# EAGLE board Digital Dice_Board (EAGLE 9.5.2)
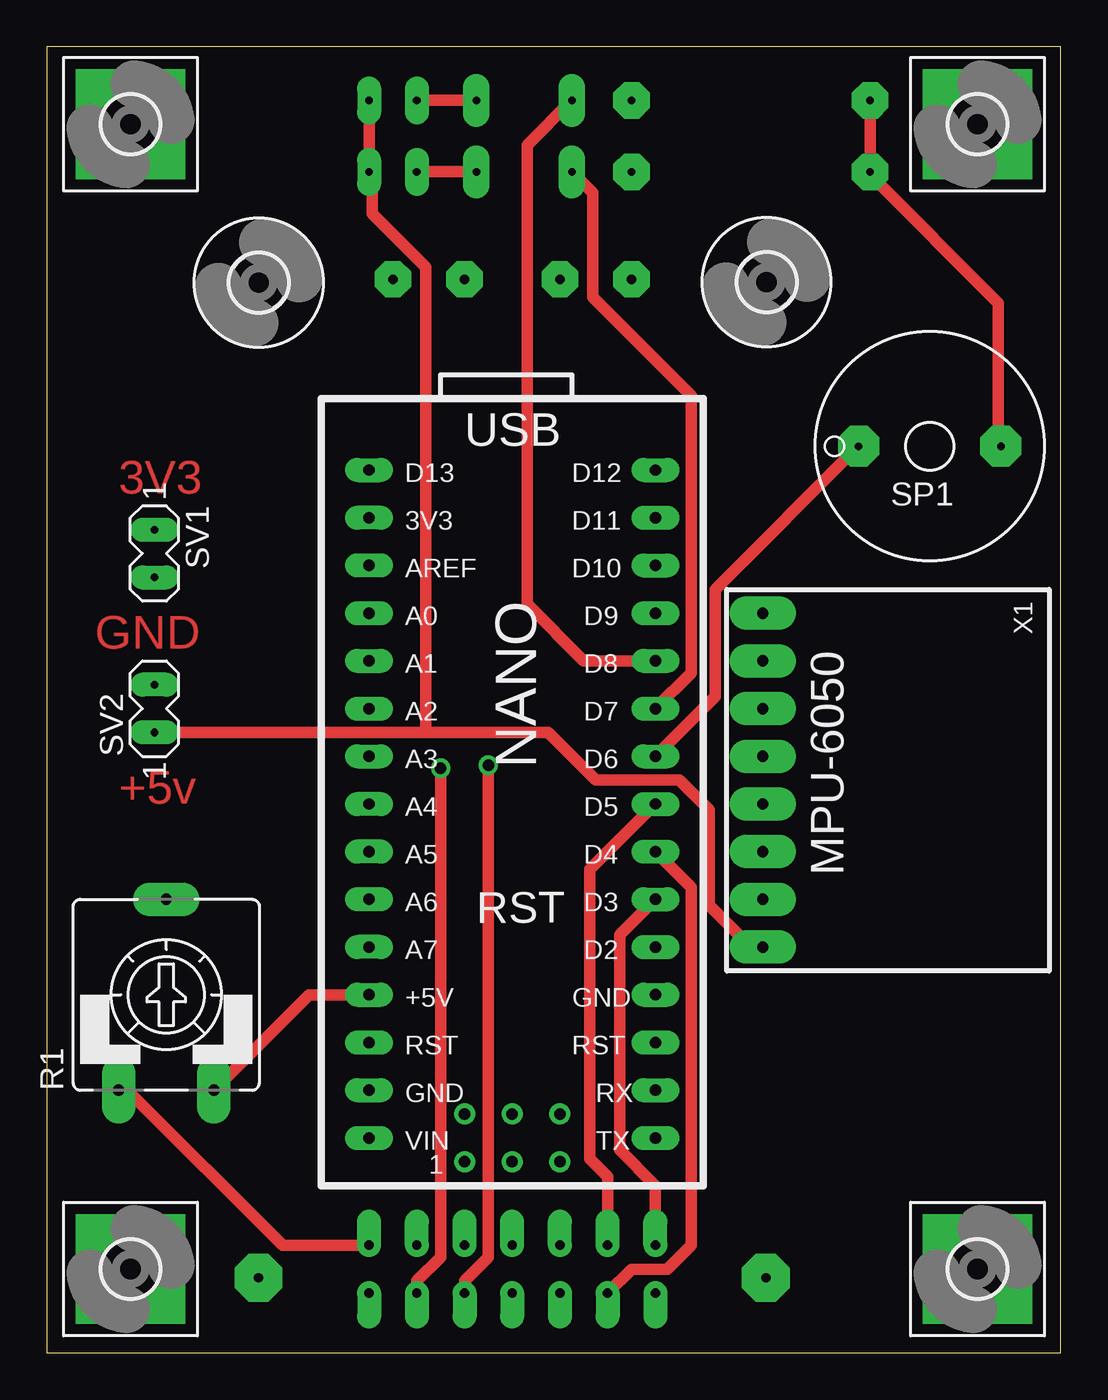
[diagram p0: board, top side]
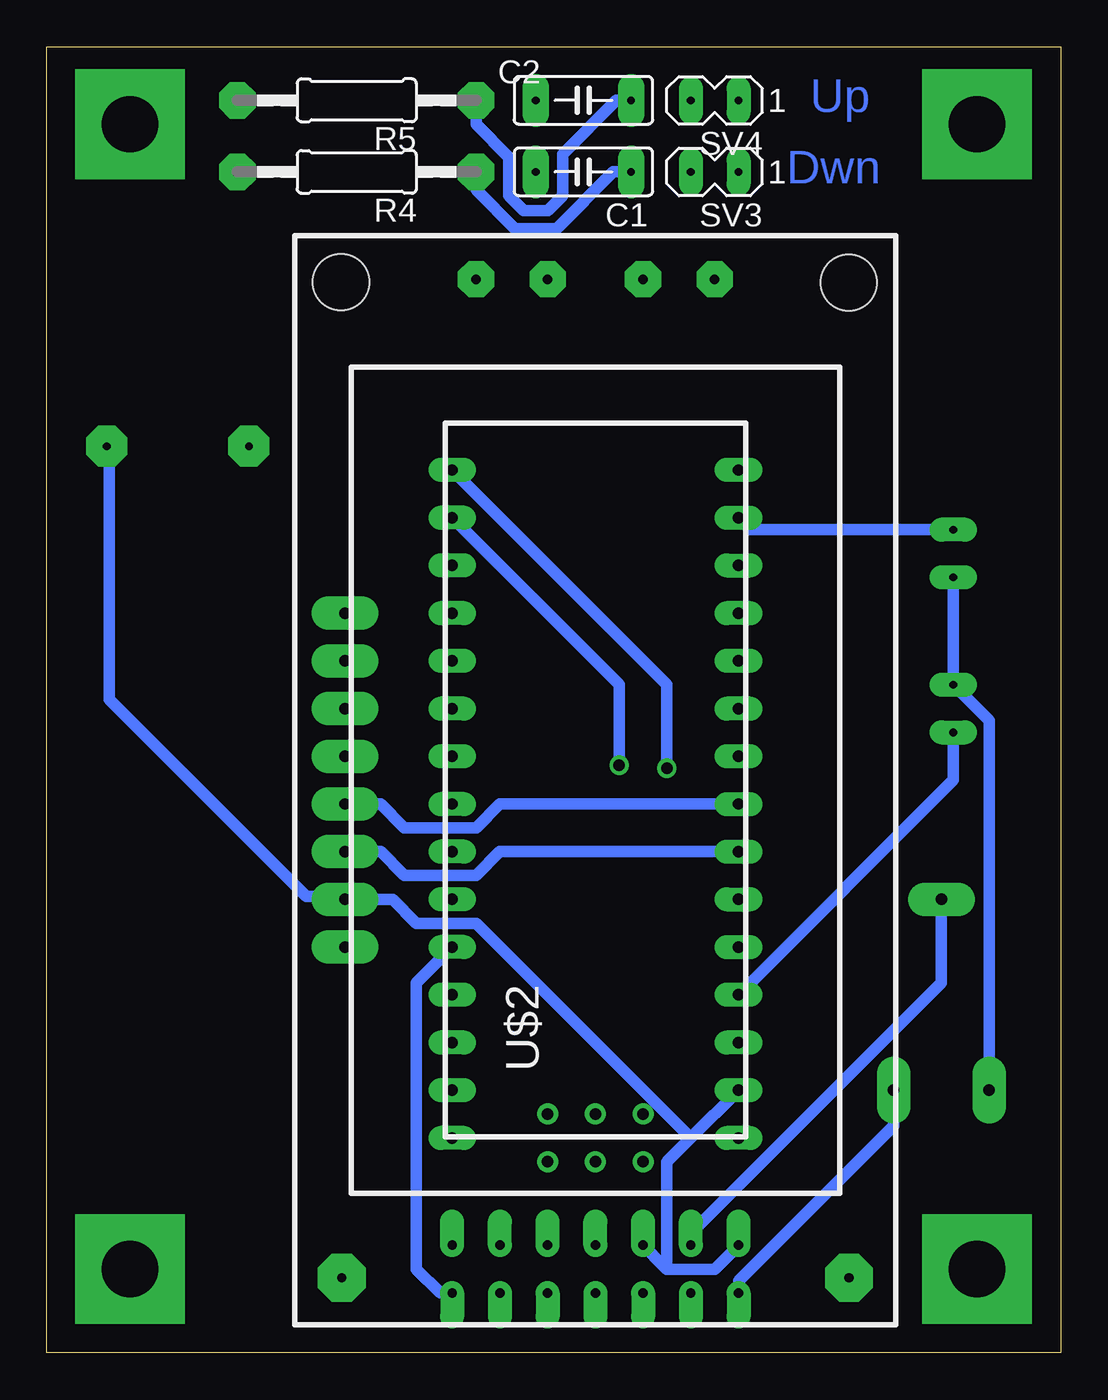
[diagram p1: board, bottom side, seen from below]

Size 53.95 x 69.52 mm. Coordinates in mm from the lower left corner, seen from the top.
Outline: 0,0 53.95,0 53.95,69.52 0,69.52 0,0
Copper layers (1*16): Top 0.035mm / dielectric 1.5mm / Bottom 0.035mm
Design rules "default *": minimum track width 24mil, minimum drill 24mil, track to track 13mil, track to pad 13mil, pad to pad 13mil, via to via 13mil, smd to smd 13mil, copper to edge 40mil, drill to drill 6mil, minimum pad ring 10mil, minimum via ring 8mil, stop-mask expansion 4mil, vias tented up to drill 0mil, thermal gap 10mil

## Footprints (pad centres in the part's own frame; a part is rotated, then mirrored left to right if it is on the bottom)
C050-025X075W = drill 0.406 pad 1.422 long: 1 -2.54,0; 2 2.54,0
3,0 = hole 3: 0,0
3,0-PAD-SQUARE = drill 3 pad 5.842 square: B3,0 0,0
CA9V = drill 0.61 pad 1.778 long: A -2.54,-5.08; E 2.54,-5.08; S 0,5.08
0207/12 = drill 0.406 pad 1.93 octagon: 1 -6.35,0; 2 6.35,0
AL60P = drill 0.406 pad 2.184 octagon: + 3.786,0; - -3.786,0
MA02-1 = drill 0.406 pad 1.27 long: 1 -2.54,0; 2 0,0
NANO = drill 0.61 pad 1.27 long: 3.3V -7.62,15.24; 5V -7.62,-10.16; A0 -7.62,10.16; A1 -7.62,7.62; A2 -7.62,5.08; A3 -7.62,2.54; A4 -7.62,0; A5 -7.62,-2.54; A6 -7.62,-5.08; A7 -7.62,-7.62; AREF -7.62,12.7; D2 7.62,-7.62; D3 7.62,-5.08; D4 7.62,-2.54; D5 7.62,0; D6 7.62,2.54; D7 7.62,5.08; D8 7.62,7.62; D9 7.62,10.16; D10 7.62,12.7; D11 7.62,15.24; D12 7.62,17.78; D13 -7.62,17.78; GND -7.62,-15.24; GND1 7.62,-10.16; RAW -7.62,-17.78; RST -7.62,-12.7; RST1 7.62,-12.7; RX1 7.62,-15.24; TX0 7.62,-17.78 | drill 0.61: ICSP1 -2.54,-19.05; ICSP2 -2.54,-16.51; ICSP3 0,-19.05; ICSP4 0,-16.51; ICSP5 2.54,-19.05; ICSP6 2.54,-16.51
ALCD0802 = drill 0.5 pad 1.93 octagon: A1 26.67,2.54; A2 26.67,6.35; K1 26.67,-6.35; K2 26.67,-2.54 | drill 0.5 pad 2.54 octagon: MH1 -26.5,13.5; MH2 -26.5,-13.5; MH3 26.5,-13.5; MH4 26.5,13.5 | drill 0.5 pad 1.27 offset: P$1 -24.765,-7.62; P$2 -27.305,-7.62; P$3 -24.765,-5.08; P$4 -27.305,-5.08; P$5 -24.765,-2.54; P$6 -27.305,-2.54; P$7 -24.765,0; P$8 -27.305,0; P$9 -24.765,2.54; P$10 -27.305,2.54; P$11 -24.765,5.08; P$12 -27.305,5.08; P$13 -24.765,7.62; P$14 -27.305,7.62
MPU = drill 0.61 pad 1.778 long: 1 -8.89,0; 2 -6.35,0; 3 -3.81,0; 4 -1.27,0; 5 1.27,0; 6 3.81,0; 7 6.35,0; 8 8.89,0

## Placement (x,y rotation side)
C1  100nf  [C050-025X075W]  25.4,62.87 180 bottom
C2  100nf  [C050-025X075W]  25.4,66.67 180 bottom
H1  MOUNT-HOLE3.0  [3,0]  38.3,57 0 top
H2  MOUNT-HOLE3.0  [3,0]  11.28,56.97 0 top
H3  MOUNT-PAD-SQUARE3.0  [3,0-PAD-SQUARE]  49.53,65.41 0 top
H4  MOUNT-PAD-SQUARE3.0  [3,0-PAD-SQUARE]  4.45,65.41 0 top
H5  MOUNT-PAD-SQUARE3.0  [3,0-PAD-SQUARE]  49.53,4.45 0 top
H6  MOUNT-PAD-SQUARE3.0  [3,0-PAD-SQUARE]  4.45,4.45 0 top
R1  10k  [CA9V]  6.35,19.05 0 top
R4  10k  [0207/12]  37.47,62.87 180 bottom
R5  10k  [0207/12]  37.47,66.67 180 bottom
SP1  AL60P  [AL60P]  46.99,48.26 180 top
SV1  [MA02-1]  5.71,41.27 270 top
SV2  [MA02-1]  5.71,35.56 90 top
SV3  [MA02-1]  19.68,62.87 180 bottom
SV4  [MA02-1]  19.68,66.67 180 bottom
U$1  NANO  [NANO]  24.77,29.21 0 top
U$2  ALCD080208X02  [ALCD0802]  24.77,30.48 90 bottom
X1  GYRO_MPU-6050  [MPU]  38.1,30.48 270 top

## Library data of the parts
C1 C2 R1 R4 R5 = bar-rcl
H1-H6 = holes
SP1 = bar-lyd
SV1-SV4 = bar-con
U$1 = bar-atmel
U$2 = bar-diverse
X1 = bar-moduler

## Nets
+5V: R1.E SV2.1 SV3.1 SV4.1 U$1.5V U$2.P$2 X1.8
GND: R1.A R4.2 R5.2 SP1.- SV1.2 SV2.2 U$1.GND U$2.P$1 U$2.P$5 X1.7
N$1: U$1.D12 U$2.P$4
N$2: C2.1 R5.1 SV4.2
N$3: U$1.A5 X1.6
N$4: U$1.A4 X1.5
N$5: R1.S U$2.P$3
N$6: SV1.1 U$1.3.3V
N$7: C1.1 R4.1 SV3.2
N$8: U$1.D11 U$2.P$6
N$9: U$1.D5 U$2.P$11
N$10: U$1.D4 U$2.P$12
N$11: U$1.D3 U$2.P$13
N$12: U$1.D2 U$2.P$14
N$13: SP1.+ U$1.D6
N$14: C1.2 U$1.D7
N$16: C2.2 U$1.D8

## Tracks (layer width: path | path; a pad name or v marks a point on that pad's centre or on a via)
+5V
  Top 0.61: SV4.1 SV3.1 17.3,62.71 17.3,60.64 20.16,57.78 20.16,33.02 | U$1.5V 13.97,19.05 R1.E | X1.8 37.47,21.59 35.24,23.81 35.24,28.89 33.66,30.48 29.21,30.48 26.67,33.02 20.16,33.02 | SV2.1 20.16,33.02
  Bottom 0.61: U$2.P$2 17.14,3.81 8.89,12.06 R1.E | SV2.1 5.71,30.48 U$1.5V
GND
  Top 0.61: R5.2 R4.2 43.81,62.71 50.64,55.88 50.64,48.26 SP1.- | R1.A 4.29,13.97 12.54,5.71 U$2.P$1
  Bottom 0.61: SV1.2 SV2.2 3.81,33.66 R1.A | U$2.P$1 18.41,4.45 20.95,4.45 21.11,4.6 | U$2.P$5 21.11,4.6 | 19.68,11.43 20.95,10.16 20.95,4.76 21.11,4.6 | 19.68,11.43 U$1.GND | 19.68,11.43 31.11,22.86 34.29,22.86 35.56,24.13 X1.7 38.26,24.29 40.16,24.29 50.64,34.77 50.64,48.26 SP1.-
N$1  (via drill 0.61)
  Top 0.61: U$2.P$4 19.68,3.81 20.95,5.08 v20.95,31.11
  Bottom 0.61: v20.95,31.11 20.95,35.56 U$1.D12
N$2
  Top 0.61: C2.1 SV4.2
  Bottom 0.61: C2.1 23.65,66.67 26.51,63.82 26.51,61.59 27.3,60.8 28.57,60.8 29.37,61.59 29.37,63.66 31.11,65.41 R5.1
N$3
  Bottom 0.61: U$1.A5 29.84,26.67 31.11,25.4 34.92,25.4 36.2,26.67 X1.6
N$4
  Bottom 0.61: U$1.A4 29.84,29.21 31.11,27.94 34.92,27.94 36.2,29.21 X1.5
N$5
  Bottom 0.61: U$2.P$3 19.68,6.35 6.35,19.68 R1.S
N$6
  Bottom 0.61: SV1.1 16.51,43.81 U$1.3.3V
N$7
  Top 0.61: C1.1 SV3.2
  Bottom 0.61: C1.1 23.81,62.87 26.83,59.85 29.05,59.85 31.11,61.91 R4.1
N$8  (via drill 0.61)
  Top 0.61: U$2.P$6 22.23,3.81 23.5,5.08 v23.5,31.27
  Bottom 0.61: v23.5,31.27 23.5,35.56 U$1.D11
N$9
  Top 0.61: U$2.P$11 29.84,9.37 28.89,10.32 28.89,25.72 U$1.D5
N$10
  Top 0.61: U$2.P$12 31.11,4.45 33.02,4.45 34.29,5.71 34.29,24.77 U$1.D4
N$11
  Top 0.61: U$2.P$13 32.38,8.89 30.48,10.79 30.48,22.23 U$1.D3
N$12
  Bottom 0.61: U$2.P$14 33.02,3.17 34.29,4.45 34.29,19.68 U$1.D2
N$13
  Top 0.61: U$1.D6 35.56,34.92 35.56,40.64 43.18,48.26 SP1.+
N$14
  Top 0.61: U$1.D7 34.29,36.2 34.29,50.96 29.05,56.2 29.05,61.75 C1.2
N$16
  Top 0.61: U$1.D8 28.57,36.83 25.56,39.85 25.56,64.29 C2.2

## Text on the board
Top: 3V3 | GND | +5v
Bottom: Up | Dwn